# Altium PCB PM6680_OCXO.PcbDoc
Units mil, origin at the board's own origin, x right, y up, seen from the top; angles counter-clockwise.
Board outline 3573.96 x 1771.68 mil, 2 copper layers (Top Layer, Bottom Layer); 27 components, 13 nets, 94 pads, 1064 vias.
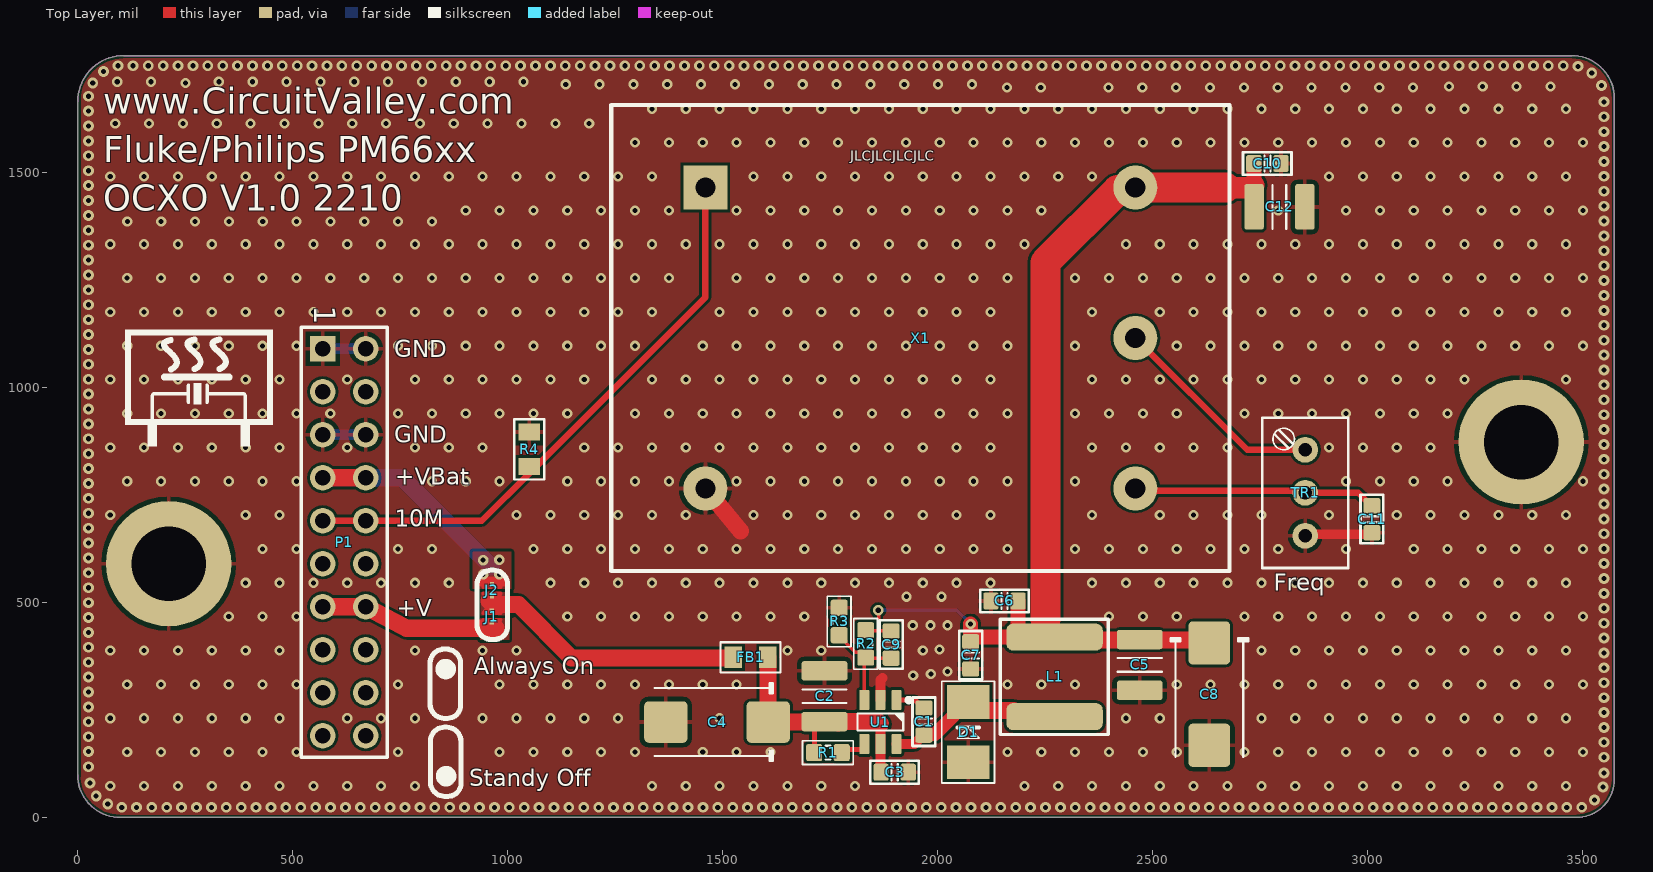
[diagram p0: Top Layer view]
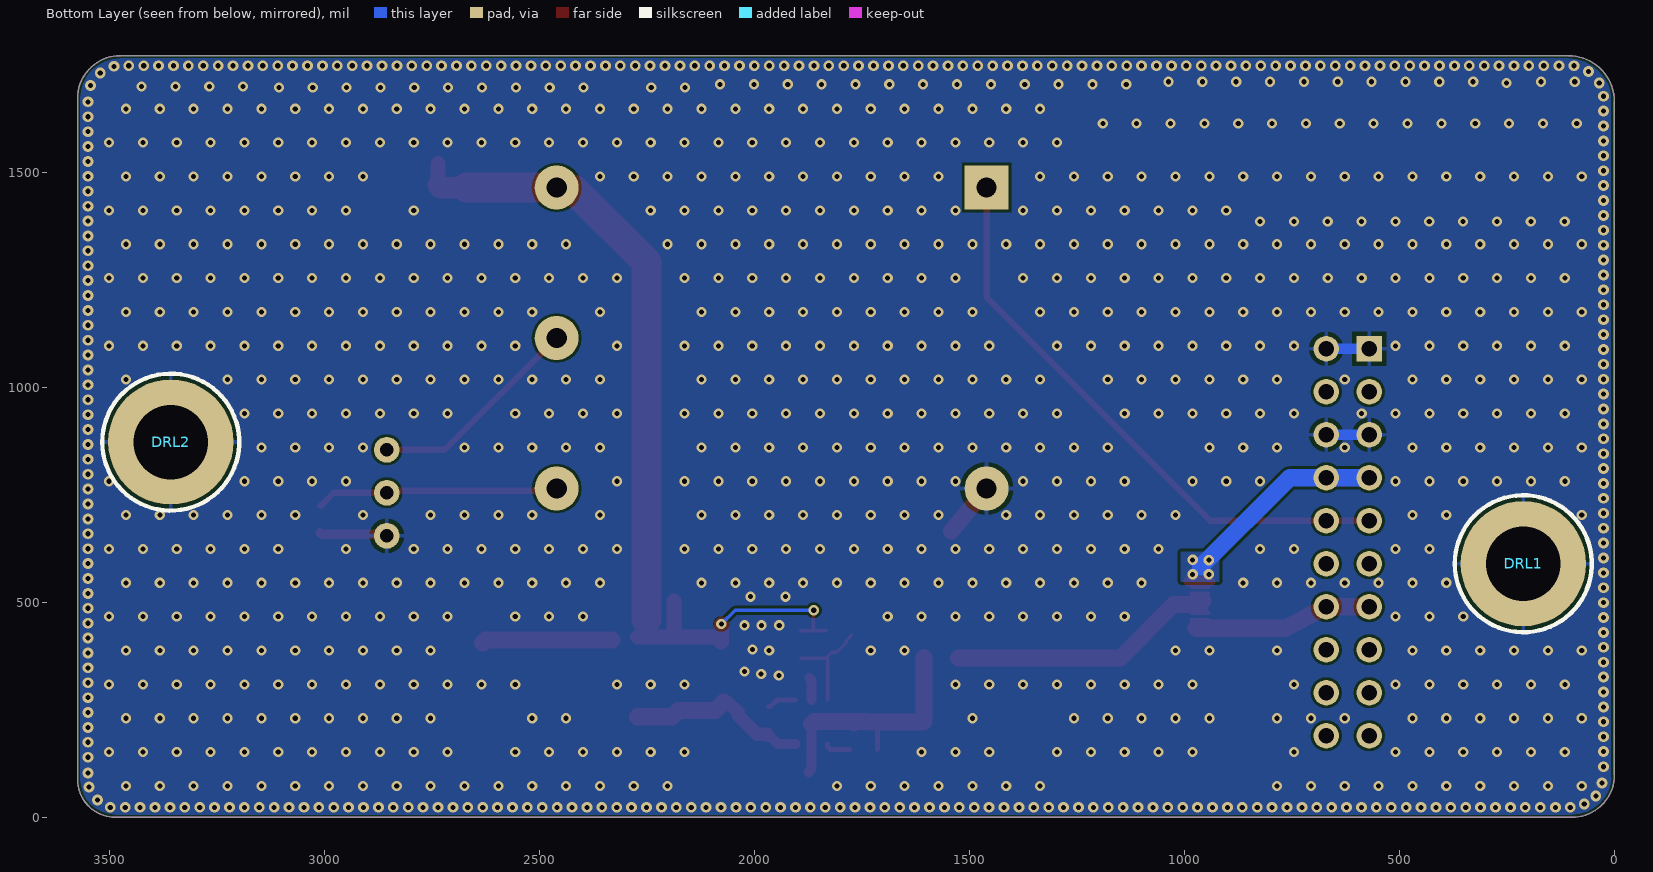
[diagram p1: Bottom Layer view, seen from below]
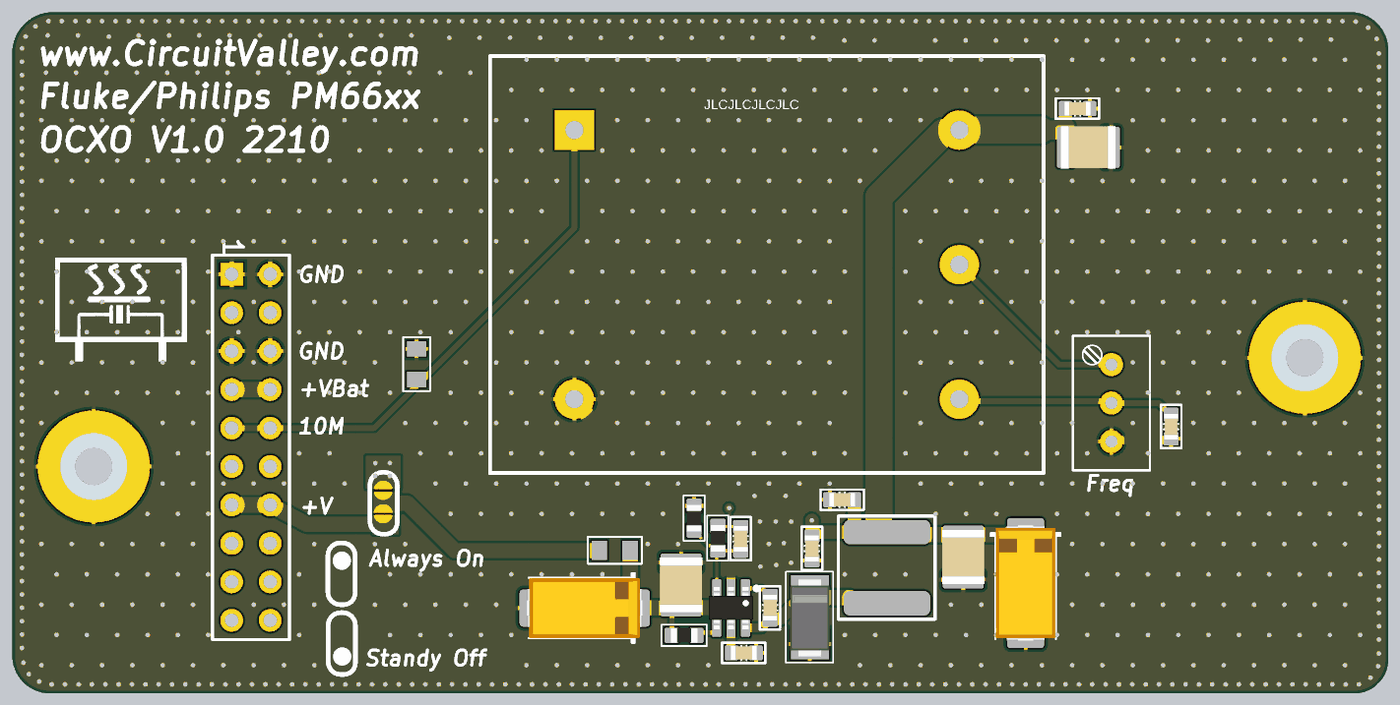
[diagram p2: 3D render of the assembled board from above, using the file's embedded part models]

## Layer stack, top to bottom
Top Solder: solder mask 0.4, Solder Resist, Dk 3.5
Top Layer: signal copper 1.4
Dielectric 1: dielectric 12.6, FR-4, Dk 4.8
Bottom Layer: signal copper 1.4
Bottom Solder: solder mask 0.4, Solder Resist, Dk 3.5

## Board outline
98.79,0 cw(c98.79,98.79) 0,98.79 0,1665 cw(c106.68,1665) 106.68,1771.68 3474.88,1771.68 cw(c3474.88,1672.6) 3573.96,1672.6 3573.96,88.18 cw(c3485.77,88.18) 3485.77,0

## Design rules (kind name [scope] priority, off if disabled: settings)
Clearance [All] p1: gap=6 ignorepadtopadclearanceinfootprint=FALSE except(0: Arc-Hole Track-Hole SMDPad-Hole THPad-Hole Via-Hole Fill-Hole Poly-Hole Region-Hole Text-Hole)
ComponentClearance [All] p1: gap=10 collisioncheckmode=3 verticalgap=3.94 showdistances=FALSE
DiffPairsRouting [All] p1: maxlimit=10 minlimit=6 mostfreqgap=6 toplayer_minwidth=6 toplayer_maxwidth=15 toplayer_prefwidth=6 bottomlayer_minwidth=6 bottomlayer_maxwidth=15 bottomlayer_prefwidth=6 maxuncoupledlength=500
MatchedLengths MIPI2 [InNetClass('MIPI_2S')] p1: tolerance=5 checknetsindiffpair=TRUE checkdiffpairvsdiffpair=FALSE checkxsignals=FALSE checkothers=FALSE
MatchedLengths MIPI [InNetClass('MIPI')] p2: tolerance=5 checknetsindiffpair=TRUE checkdiffpairvsdiffpair=FALSE checkxsignals=FALSE checkothers=FALSE
PlaneConnect [All] p1: pad.planeconnectstyle=Relief pad.reliefexpansion=20 pad.reliefentries=4 pad.reliefconductorwidth=10 pad.reliefairgap=10 via.planeconnectstyle=Direct via.reliefexpansion=20 via.reliefentries=4 via.reliefconductorwidth=10 via.reliefairgap=10
PolygonConnect [All] p1: thpad.connectstyle=Relief thpad.reliefconductorwidth=10 thpad.reliefentries=4 thpad.polygonreliefangle="90 Angle" thpad.airgapwidth=10 smdpad.connectstyle=Relief smdpad.reliefconductorwidth=10 smdpad.reliefentries=4 smdpad.polygonreliefangle="90 Angle" smdpad.airgapwidth=10 via.connectstyle=Direct via.reliefconductorwidth=10 via.reliefentries=4 via.polygonreliefangle="90 Angle" via.airgapwidth=10
RoutingVias [All] p1: holewidth=11.81 width=24 viastyle="Through Hole" minholewidth=10 minwidth=20 maxholewidth=196.85 maxwidth=250
SolderMaskExpansion [All] p1: expansion=4 istentingtop=FALSE
Width [All] p1: maxlimit=500 minlimit=6 preferedwidth=10
27 further rules are at their usual default settings.

## Components (designator, comment, footprint, x,y, rotation, side; value= is the part's Value field where it differs from the comment)
C1 "22n" CAPC1608N 1968.26,222.88 r90 top
C2 "10µ" CAPC3225N 1737.01,281.88 r90 top
C3 "100n" CAPC1608N 1900.18,105.2 r0 top
C4 "47uf 20V D" CAPMP7343X310N 1487.01,221.88 r180 top
C5 "10µ" CAPC3225N 2470.04,354.68 r270 top
C6 "10n" CAPC1608N 2155.59,503.47 r180 top
C7 "100n" CAPC1608N 2077.01,376.88 r270 top
C8 "47uf 20V D" CAPMP7343X310N 2632.01,286.88 r270 top
C9 "100pF" CAPC1608N 1892.01,401.88 r270 top
C10 "100n" CAPC1608N 2767.01,1520.81 r0 top
C11 "100n" CAPC1608N 3010,693.5 r270 top
C12 "10µ" CAPC3225N 2795,1420 r0 top
D1 "MBRS140" DIODE-SMA 2071.53,93.94 r270 top
DRL1 "Wurth Standoff" Wurth_PCB_STANDOFF_7740_6mm 211.73,590 r180 bottom
DRL2 "Wurth Standoff" Wurth_PCB_STANDOFF_7740_6mm 3357.4,872.87 r180 bottom
FB1 "" 0805FB-600Z 1534.95,372.24 r0 top
J1 "SMD Jumper" SMD_Jumper#1 963.45,467.13 r90 top
J2 "SMD Jumper" SMD_Jumper#2 963.45,528.12 r270 top
L1 "NR6028T4R7M" TAIYO_NR6028T4R7M 2272.01,326.88 r90 top
P1 "Header 10X2" HDR2X10 570,1090 r270 top
R1 "Thick Film" RESC1608N_ZERO 1745.03,150.77 r0 top value=100K
R2 "Thick Film" RESC1608N_ZERO 1832.83,403.52 r270 top value=49.9K
R3 "Thick Film" RESC1608N_ZERO 1771.1,455.68 r270 top value=9.53K
R4 "49.9R" 0805R-5K6 1050.35,826.13 r90 top
TR1 "" TRIMMER-MT 2855,655 r90 top
U1 "AP5100" SOT23-6 1867.01,221.88 r270 top
X1 "OCXO 36x27" OCXO_Small 1960,1115 r270 top

## Footprints (in the part's own frame and the unit in brackets; to place one, negate y for a bottom-side part, rotate by r counter-clockwise, add the part's x,y. Pads: shape width x height; smd on the part's side, far side on the other; paste and mask are expansions set on the pad)
0805FB-600Z [mil] "FERRITE BEAD 0805"
  rect 40x50 smd: 1(-10,0) 2(70,0)
  silkscreen extent -40,-35 100,35, body extent -11,-25 70,25, height 26
0805R-5K6 [mil] "RESISTOR 0805"
  rect 40x50 smd: 1(-10,0) 2(70,0)
  silkscreen extent -40,-35 100,35, body extent -11,-25 70,25, height 27
CAPC1608N [mm] "Chip Capacitor, Body 1.6x0.8mm, 0603, IPC Medium Density"
  round 0.254 on Mech14: 0(0,0)
  rrect25% 0.9x1 smd: 1(-0.8,0) 2(0.8,0)
  silkscreen extent -1.44,-0.67 1.42,0.68, body extent -0.85,-0.45 0.85,0.45, height 0.89
CAPC3225N [mm] "Chip Capacitor, Body 3.2x2.5mm, 1210, IPC Medium Density"
  round 0.508 on Mech14: 0(0,0)
  rrect25% 1.15x2.7 smd: 1(-1.5,0) 2(1.5,0)
  silkscreen extent -0.4,-1.3 0.4,1.3, body extent -1.8,-1.4 1.8,1.4, height 2.19
CAPMP7343X310N [mm] "Molded body capacitor, Body 7.3x4.3mm, 2917, IPC Nominal settings"
  round 1 on Mech14: 0(0,0)
  rrect20% 2.55x2.45 smd: 1(-3.025,0) 2(3.025,0)
  silkscreen extent -3.3,-2.3 3.7,2.3, body extent -3.8,-1.97 3.8,1.98, height 3.1
DIODE-SMA [mm]
  rect 2x2.5 smd: A(-0.875,0) K(-4.425,0)
  silkscreen extent -5.65,-1.58 0.35,1.55, body extent -5.2,-1.3 0,1.3, height 2.4
HDR2X10 [mm] "Connector; Header; 10x2 Position"
  rect 1.5x1.5 hole 0.9: 1(0,0)
  round 1.5 hole 0.9: 2(0,2.54) 3(2.54,0) 4(2.54,2.54) 5(5.08,0) 6(5.08,2.54) 7(7.62,0) 8(7.62,2.54) 9(10.16,0) 10(10.16,2.54) 11(12.7,0) 12(12.7,2.54) 13(15.24,0) 14(15.24,2.54) 15(17.78,0) 16(17.78,2.54) 17(20.32,0) 18(20.32,2.54) 19(22.86,0) 20(22.86,2.54)
  silkscreen extent -1.27,-1.27 24.13,3.81
OCXO_Small [mm] "Bliley 6891 ISOTEMP OCXO131"
  rect 2.6x2.6 hole 1.2: 1(-8.89,-12.7)
  round 2.6 hole 1.2: 2(8.89,-12.7) 3(8.89,12.7) 4(0,12.7) 5(-8.89,12.7)
  silkscreen extent -13.77,-18.26 13.77,18.26, body extent -13.77,-18.26 13.77,18.24, height 19.8
RESC1608N_ZERO [mm] "Chip Resistor, Body 1.6x0.8mm, 0603, IPC Medium Density"
  round 0.254 on Mech14: 0(0,0)
  rrect25% 0.95x1 smd: 1(-0.813,0) 2(0.813,0)
  Top Layer pour cut-out: -0.4,0.6 0.4,0.6 0.4,-0.6 -0.4,-0.6
  silkscreen extent -1.5,-0.7 1.5,0.7, body extent -0.87,-0.47 0.88,0.48, height 0.54
SMD_Jumper#1 [mil]
  rect 10x10 smd paste-300: 1(-13.86,0.05)
  rect 10x10 smd paste-30: 2(14.14,0.05)
  Top Layer region: 8,18 10,18 20,8 20,-9 11,-18 8,-18
  Top Layer region: -8,18 -10,18 -20,8 -20,-9 -11,-18 -8,-18
  Top Layer lines w8: -7.17,20.43 ccw(c1,0) -7.17,-20.43 -7.17,-15 -7.17,0.05 -7.17,20.43 ; 7.17,20.43 cw(c-1,0) 21,0.05 cw(c-1,0) 21,-0.05 cw(c-1,0) 7.17,-20.43 7.17,0.05 7.17,20.43
SMD_Jumper#2 [mil]
  rect 10x10 smd paste-300: 1(-13.86,0.05)
  rect 10x10 smd paste-30: 2(14.14,0.05)
  Top Layer region: 8,18 10,18 20,8 20,-9 11,-18 8,-18
  Top Layer region: -8,18 -10,18 -20,8 -20,-9 -11,-18 -8,-18
  Top Layer lines w8: 7.17,-20.43 ccw(c-1,0) 21,0.05 ccw(c-1,0) 7.17,20.43 7.17,0.05 7.17,-20.43 ; -7.17,-20.43 cw(c1,0) -20.93,-1.74 cw(c1,0) -20.93,1.74 cw(c1,0) -7.17,20.43 -7.17,0.05 -7.17,-20.43
SOT23-6 [mm]
  round 0.5 on Mech14: 0(0,0)
  rrect25% 1.2x0.6 smd: 1(-1.3,0.95) 2(-1.3,0) 3(-1.3,-0.95) 4(1.3,-0.95) 5(1.3,0) 6(1.3,0.95)
  silkscreen extent -1.42,-1.35 0.51,1.81, body extent -1.4,-1.45 1.4,1.45, height 1.45
TAIYO_NR6028T4R7M [mm]
  rrect50% 1.6x5.7 smd: 1(-2.35,0) 2(2.35,0)
  silkscreen extent -3.4,-3.18 3.41,3.2, body extent -3,-3 3,3, height 2.8
TRIMMER-MT [mil]
  round 60 hole 32: 1(0,0) 2(200,0) W(100,0)
  silkscreen extent -75,-100 275,100
Wurth_PCB_STANDOFF_7740_6mm [mm] "9774010360"
  round 7.4 hole 4.4: 0(0,0)
  silkscreen extent -4.05,-4.05 4.04,4.05, body extent -3,-3 3,3, height 6.01

## Part data
C1 C3 C6 C7 C9 C10 C11: library part CAPC_10p_0603_NP0_1%_50V, "Capacitor SMD Cer 10pF 5% 50V NP0 0603", Manufacturer 1="Murata Electronics North America", Manufacturer Part Number 1=GRM1885C1H100FA01J, Operating Temperature="-55°C ~ 125°C", Package / Case="0603 (1608 Metric)", Ratings="50V; NP0", Supplier Part Number 1=GRM1885C1H100FA01J-ND, Tolerance=±5%, Part=C0603X104K5RAC, Size / Dimension="0.063\" L x 0.032\" W (1.60mm x 0.81mm)", Supplier 1=Digi-Key, Thickness (Max)="0.035\" (0.90mm)"
C2 C5 C12: library part CAPC_10u_1210_50V, "Capacitor SMD Cer 10uF 20% 16V X5R 1210", Manufacturer 1="Taiyo Yuden", Manufacturer Part Number 1=UMK325BJ106MM-T, Package / Case="1210 (3225 Metric)", Ratings="50V; X5R", Supplier Part Number 1=587-2225-1-ND, Tolerance=±20%, Material=ceramic, Size / Dimension="0.126\" L x 0.098\" W (3.20mm x 2.50mm)", Supplier 1=Digi-Key
C4 C8: library part CAPT_330u_2917_6V3, "Capacitor SMD Tant 330uF 20% 6V3 2917", ESR (Equivalent Series Resistance)="15 mOhm", Manufacturer Part Number=T520D337M006ATE015, Manufacturer Size Code=D, Operating Temperature="-55°C ~ 125°C", Package / Case="2917 (7343 Metric)", Ratings=6.3V, Supplier Part Number 1=399-4052-1-ND, Tolerance=±20%, ComponentLink1Description="T520D Datasheet", ComponentLink1URL=http://www.kemet.com/datasheets&T520D337M006ATE015, Height - Seated (Max)="0.122\" (3.10mm)", Material="Solid Tantalum", Part=T495D476K020ATE175, Size / Dimension="0.287\" L x 0.169\" W (7.30mm x 4.30mm)", Supplier 1=Digi-Key
D1: "DIODE", Supplier Part Number 1=MBRS140FSTR-ND, Supplier 1=Digi-Key
DRL1 DRL2: library part PCB_Sandoff, Part=9774050360
FB1: library part 0805FB-600Z, "FERRITE BEAD 600 OHM 2A", Part=ILHB0805ER300V, Reel=F5
J1 J2: library part SMD_Jumper
L1: library part inductor_smd
P1: "Header, 10-Pin, Dual row", LatestRevisionDate=17-Jul-2002, LatestRevisionNote="Re-released for DXP Platform.", Publisher="Altium Limited"
R1 R2 R3: library part RES_0R_0603, "Resistor SMD chip 0.0 Ohm 0.1W 0603", Manufacturer 1=Vishay/Dale, Manufacturer Part Number 1=CRCW06030000Z0EA, Package / Case="0603 (1608metric)", Ratings=1/10W, Supplier Part Number 1=541-0.0GCT-ND, Tolerance=±5%, Supplier 1=Digi-Key
R4: library part 0805R-5K6, "RESISTOR 0805 1/4 WATT THIN FILM", Part=RK73H2ATTD2150F
TR1: library part THTRIM-GENERIC, "TRIMMABLE RESISTOR", Part=T93XA103KT20
X1: library part OCXO_Small_Bliey_6891_isotemp_ocxo131, Part="CTS 970"

## Via types
v1: diameter 23.62, hole 11.81, Top Layer to Bottom Layer, tented both sides, 759 vias
v2: diameter 25, hole 12.01, Top Layer to Bottom Layer, 299 vias
v3: diameter 24, hole 11.81, Top Layer to Bottom Layer, tented both sides, 6 vias

## Nets (pads, with @x,y where several pads share a name; then routed paths per layer and width w, separated by ;. In a path a pad name is that pad's centre, name@x,y a point inside that pad or via, vN(x,y) a via of type N, cw(c..) or ccw(c..) an arc to the next point about the centre after c; other vN are vias at no path point)
10Mhz: P1.9 P1.10 R4.1 X1.1 | length 1360.4
  Top Layer w15: P1.9 P1.10 850,690 940,690 1053,803 1460,1210 X1.1
24V: FB1.1 J1.2 J2.2 | length 655.3
  Top Layer w19.68: J1.2 963.39,488.13 963.39,496.61 963.39,498.01 ; 963.5,498.01 963.5,507.12 J2.2
  Top Layer w39.37: 957,503 963.39,496.61 965,495 1025,495 1148.86,371.14 FB1.1@1524.89,371.14 ; 963.59,495 963.69,495
+5V: C5.1 C6.1 C7.1 C8.1 C9.1 C10.1 C12.1 L1.2 R2.1 X1.5 | length 2418.2
  Top Layer w8: R2.1 1834.28,434.09 1862.79,434.09 ; v3(1862.01,481.88) 1862.79,481.1 1862.79,434.09 ; C9.1 1891.31,434.09 1862.79,434.09
  Top Layer w35: v3(2076.97,449.88) C7.1 C7.1 2078.98,408.38 2090.01,419.4 L1.2@2208.02,419.4 ; C6.1 2186.99,503.37 2186.99,433.4 2200.98,419.4 L1.2@2208.02,419.4 ; L1.2 L1.2@2208.02,419.4 ; C10.1 2735.73,1520.6 C12.1@2735.73,1470
  Top Layer w40: L1.2@2331.5,412.69 2625.3,412.69 C8.1
  Top Layer w50: 2670,1465 2730.73,1465 C12.1@2735.73,1470
  Top Layer w70: 2250.71,460.41 2250.71,1290.71 2418.81,1458.81 2453.81,1458.81 X1.5 2670,1465
  Bottom Layer w8: v3(1862.01,481.88) 2044.97,481.88 v3(2076.97,449.88)
GND: C2.2 C3.2 C4.2 C5.2 C6.2 C7.2 C8.2 C10.2 C11.2 C12.2 D1.A DRL1.0 DRL2.0 P1.1 P1.2 P1.5 P1.6 R3.1 R4.2 TR1.1 U1.2 X1.2 | length 539.5
  Top Layer w22: TR1.1 2858.5,658.5 3006.5,658.5 C11.2
  Top Layer w23.62: U1.2 1867.01,319.01 1872,324
  Top Layer w39.37: X1.2 1542,666
  Bottom Layer w23.62: P1.5 P1.6 ; P1.1 P1.2
  other v1: 75.83,73.23 154.57,73.23 233.31,73.23 312.05,73.23 390.79,73.23 469.53,73.23 548.27,73.23 627.01,73.23 705.75,73.23 784.49,73.23 1335.67,73.23 1414.41,73.23 1493.15,73.23 1571.89,73.23 1650.63,73.23 1729.37,73.23 1808.11,73.23 2201.81,73.23 2280.55,73.23 2359.29,73.23 2438.03,73.23 2516.77,73.23 2595.52,73.23 2674.26,73.23 2753,73.23 2831.74,73.23 2910.48,73.23 2989.22,73.23 3067.96,73.23 3146.7,73.23 3225.44,73.23 3304.18,73.23 3382.92,73.23 3461.66,73.23 115.2,151.97 193.94,151.97 272.68,151.97 351.42,151.97 430.16,151.97 508.9,151.97 745.12,151.97 981.34,151.97 1060.08,151.97 1138.82,151.97 1217.56,151.97 1296.3,151.97 1453.78,151.97 1532.52,151.97 1611.26,151.97 2162.44,151.97 2241.18,151.97 2319.92,151.97 2398.66,151.97 2477.4,151.97 2556.14,151.97 2713.63,151.97 2792.37,151.97 2871.11,151.97 2949.85,151.97 3028.59,151.97 3107.33,151.97 3186.07,151.97 3264.81,151.97 3343.55,151.97 3422.29,151.97 3501.03,151.97 75.83,230.71 154.57,230.71 233.31,230.71 312.05,230.71 390.79,230.71 469.53,230.71 627.01,230.71 705.75,230.71 784.49,230.71 941.97,230.71 1020.71,230.71 1099.45,230.71 1178.19,230.71 1256.93,230.71 1493.15,230.71 2438.03,230.71 2516.77,230.71 2753,230.71 2831.74,230.71 2910.48,230.71 2989.22,230.71 3067.96,230.71 3146.7,230.71 3225.44,230.71 3304.18,230.71 3382.92,230.71 3461.66,230.71 115.2,309.45 193.94,309.45 272.68,309.45 351.42,309.45 430.16,309.45 508.9,309.45 745.12,309.45 981.34,309.45 1060.08,309.45 1138.82,309.45 1217.56,309.45 1296.3,309.45 1375.04,309.45 1453.78,309.45 1532.52,309.45 2162.44,309.45 2241.18,309.45 2319.92,309.45 2556.14,309.45 2634.89,309.45 2713.63,309.45 2792.37,309.45 2871.11,309.45 2949.85,309.45 3028.59,309.45 3107.33,309.45 3186.07,309.45 3264.81,309.45 3343.55,309.45 3422.29,309.45 3501.03,309.45 1943.25,329.77 1984.25,333.77 2023.25,339.77 75.83,388.19 154.57,388.19 233.31,388.19 312.05,388.19 390.79,388.19 469.53,388.19 784.49,388.19 941.97,388.19 1020.71,388.19 1650.63,388.19 1729.37,388.19 1965.59,388.19 2753,388.19 2831.74,388.19 2910.48,388.19 2989.22,388.19 3067.96,388.19 3146.7,388.19 3225.44,388.19 3304.18,388.19 3382.92,388.19 3461.66,388.19 2004.25,390.77 1942.25,446.77 1983.25,446.77 2023.25,446.77 351.42,466.93 430.16,466.93 508.9,466.93 1138.82,466.93 1217.56,466.93 1296.3,466.93 1375.04,466.93 1453.78,466.93 1532.52,466.93 1611.26,466.93 1690,466.93 2398.66,466.93 2477.4,466.93 2556.14,466.93 2713.63,466.93 2792.37,466.93 2871.11,466.93 2949.85,466.93 3028.59,466.93 3107.33,466.93 3186.07,466.93 3264.81,466.93 3343.55,466.93 3422.29,466.93 3501.03,466.93 1928.06,513.36 2008.96,513.36 390.79,545.67 469.53,545.67 548.27,545.67 627.01,545.67 705.75,545.67 784.49,545.67 863.23,545.67 1099.45,545.67 1178.19,545.67 1256.93,545.67 1335.67,545.67 1414.41,545.67 1493.15,545.67 1571.89,545.67 1650.63,545.67 1729.37,545.67 1808.11,545.67 1886.85,545.67 1965.59,545.67 2044.33,545.67 2123.07,545.67 2359.29,545.67 2438.03,545.67 2516.77,545.67 2595.52,545.67 2674.26,545.67 2753,545.67 2831.74,545.67 2910.48,545.67 2989.22,545.67 3067.96,545.67 3146.7,545.67 3225.44,545.67 3304.18,545.67 3382.92,545.67 3461.66,545.67 430.16,624.41 508.9,624.41 745.12,624.41 823.86,624.41 1060.08,624.41 1138.82,624.41 1217.56,624.41 1296.3,624.41 1375.04,624.41 1453.78,624.41 1532.52,624.41 1611.26,624.41 1690,624.41 1768.74,624.41 1847.48,624.41 1926.22,624.41 2004.96,624.41 2083.7,624.41 2162.44,624.41 2319.92,624.41 2398.66,624.41 2477.4,624.41 2556.14,624.41 2634.89,624.41 2713.63,624.41 2792.37,624.41 2949.85,624.41 3107.33,624.41 3186.07,624.41 3264.81,624.41 3343.55,624.41 3422.29,624.41 3501.03,624.41 75.83,703.15 390.79,703.15 469.53,703.15 1020.71,703.15 1099.45,703.15 1178.19,703.15 1256.93,703.15 1335.67,703.15 1414.41,703.15 1571.89,703.15 1650.63,703.15 1729.37,703.15 1808.11,703.15 1886.85,703.15 1965.59,703.15 2044.33,703.15 2123.07,703.15 2359.29,703.15 2516.77,703.15 2595.52,703.15 2674.26,703.15 2753,703.15 2910.48,703.15 3067.96,703.15 3146.7,703.15 3225.44,703.15 3304.18,703.15 3382.92,703.15 3461.66,703.15 115.2,781.89 193.94,781.89 272.68,781.89 351.42,781.89 430.16,781.89 508.9,781.89 823.86,781.89 902.6,781.89 981.34,781.89 1138.82,781.89 1217.56,781.89 1296.3,781.89 1375.04,781.89 1532.52,781.89 1611.26,781.89 1690,781.89 1768.74,781.89 1847.48,781.89 1926.22,781.89 2004.96,781.89 2083.7,781.89 2162.44,781.89 2319.92,781.89 2949.85,781.89 3028.59,781.89 3107.33,781.89 3186.07,781.89 3501.03,781.89 75.83,860.63 154.57,860.63 233.31,860.63 312.05,860.63 390.79,860.63 469.53,860.63 627.01,860.63 784.49,860.63 863.23,860.63 941.97,860.63 1178.19,860.63 1256.93,860.63 1335.67,860.63 1414.41,860.63 1493.15,860.63 1571.89,860.63 1650.63,860.63 1729.37,860.63 1808.11,860.63 1886.85,860.63 1965.59,860.63 2044.33,860.63 2123.07,860.63 2359.29,860.63 2438.03,860.63 2516.77,860.63 2595.52,860.63 2674.26,860.63 2910.48,860.63 2989.22,860.63 3067.96,860.63 3146.7,860.63 115.2,939.37 193.94,939.37 272.68,939.37 351.42,939.37 430.16,939.37 508.9,939.37 587.64,939.37 745.12,939.37 823.86,939.37 902.6,939.37 981.34,939.37 1060.08,939.37 1138.82,939.37 1296.3,939.37 1375.04,939.37 1453.78,939.37 1532.52,939.37 1611.26,939.37 1690,939.37 1768.74,939.37 1847.48,939.37 1926.22,939.37 2004.96,939.37 2083.7,939.37 2162.44,939.37 2319.92,939.37 2398.66,939.37 2477.4,939.37 2556.14,939.37 2713.63,939.37 2792.37,939.37 2871.11,939.37 2949.85,939.37 3028.59,939.37 3107.33,939.37 3186.07,939.37 75.83,1018.11 154.57,1018.11 233.31,1018.11 312.05,1018.11 390.79,1018.11 469.53,1018.11 627.01,1018.11 784.49,1018.11 863.23,1018.11 941.97,1018.11 1020.71,1018.11 1099.45,1018.11 1178.19,1018.11 1335.67,1018.11 1414.41,1018.11 1493.15,1018.11 1571.89,1018.11 1650.63,1018.11 1729.37,1018.11 1808.11,1018.11 1886.85,1018.11 1965.59,1018.11 2044.33,1018.11 2123.07,1018.11 2359.29,1018.11 2438.03,1018.11 2516.77,1018.11 2595.52,1018.11 2674.26,1018.11 2753,1018.11 2831.74,1018.11 2910.48,1018.11 2989.22,1018.11 3067.96,1018.11 3146.7,1018.11 3225.44,1018.11 3461.66,1018.11 115.2,1096.85 193.94,1096.85 272.68,1096.85 351.42,1096.85 430.16,1096.85 508.9,1096.85 745.12,1096.85 823.86,1096.85 902.6,1096.85 981.34,1096.85 1060.08,1096.85 1138.82,1096.85 1217.56,1096.85 1296.3,1096.85 1453.78,1096.85 1532.52,1096.85 1611.26,1096.85 1690,1096.85 1768.74,1096.85 1847.48,1096.85 1926.22,1096.85 2004.96,1096.85 2083.7,1096.85 2162.44,1096.85 2319.92,1096.85 2556.14,1096.85 2634.89,1096.85 2713.63,1096.85 2792.37,1096.85 2871.11,1096.85 2949.85,1096.85 3028.59,1096.85 3107.33,1096.85 3186.07,1096.85 3264.81,1096.85 3343.55,1096.85 3422.29,1096.85 3501.03,1096.85 75.83,1175.59 154.57,1175.59 233.31,1175.59 312.05,1175.59 390.79,1175.59 469.53,1175.59 548.27,1175.59 627.01,1175.59 705.75,1175.59 784.49,1175.59 863.23,1175.59 941.97,1175.59 1020.71,1175.59 1099.45,1175.59 1178.19,1175.59 1256.93,1175.59 1335.67,1175.59 1493.15,1175.59 1571.89,1175.59 1650.63,1175.59 1729.37,1175.59 1808.11,1175.59 1886.85,1175.59 1965.59,1175.59 2044.33,1175.59 2123.07,1175.59 2359.29,1175.59 2516.77,1175.59 2595.52,1175.59 2674.26,1175.59 2753,1175.59 2831.74,1175.59 2910.48,1175.59 2989.22,1175.59 3067.96,1175.59 3146.7,1175.59 3225.44,1175.59 3304.18,1175.59 3382.92,1175.59 3461.66,1175.59 115.2,1254.33 193.94,1254.33 272.68,1254.33 351.42,1254.33 430.16,1254.33 508.9,1254.33 587.64,1254.33 666.38,1254.33 745.12,1254.33 823.86,1254.33 902.6,1254.33 981.34,1254.33 1060.08,1254.33 1138.82,1254.33 1217.56,1254.33 1296.3,1254.33 1375.04,1254.33 1532.52,1254.33 1611.26,1254.33 1690,1254.33 1768.74,1254.33 1847.48,1254.33 1926.22,1254.33 2004.96,1254.33 2083.7,1254.33 2162.44,1254.33 2319.92,1254.33 2398.66,1254.33 2477.4,1254.33 2556.14,1254.33 2634.89,1254.33 2713.63,1254.33 2792.37,1254.33 2871.11,1254.33 2949.85,1254.33 3028.59,1254.33 3107.33,1254.33 3186.07,1254.33 3264.81,1254.33 3343.55,1254.33 3422.29,1254.33 3501.03,1254.33 75.83,1333.07 154.57,1333.07 233.31,1333.07 312.05,1333.07 390.79,1333.07 469.53,1333.07 548.27,1333.07 627.01,1333.07 705.75,1333.07 784.49,1333.07 863.23,1333.07 941.97,1333.07 1020.71,1333.07 1099.45,1333.07 1178.19,1333.07 1256.93,1333.07 1335.67,1333.07 1414.41,1333.07 1493.15,1333.07 1571.89,1333.07 1650.63,1333.07 1729.37,1333.07 1808.11,1333.07 1886.85,1333.07 1965.59,1333.07 2044.33,1333.07 2123.07,1333.07 2201.81,1333.07 2438.03,1333.07 2516.77,1333.07 2595.52,1333.07 2674.26,1333.07 2753,1333.07 2831.74,1333.07 2910.48,1333.07 2989.22,1333.07 3067.96,1333.07 3146.7,1333.07 3225.44,1333.07 3304.18,1333.07 3382.92,1333.07 3461.66,1333.07 115.52,1385.61 194.26,1385.61 273,1385.61 351.74,1385.61 430.48,1385.61 509.22,1385.61 587.96,1385.61 666.7,1385.61 745.44,1385.61 824.18,1385.61 902.6,1411.81 981.34,1411.81 1060.08,1411.81 1138.82,1411.81 1217.56,1411.81 1296.3,1411.81 1375.04,1411.81 1532.52,1411.81 1611.26,1411.81 1690,1411.81 1768.74,1411.81 1847.48,1411.81 1926.22,1411.81 2004.96,1411.81 2083.7,1411.81 2162.44,1411.81 2241.18,1411.81 2792.37,1411.81 2949.85,1411.81 3028.59,1411.81 3107.33,1411.81 3186.07,1411.81 3264.81,1411.81 3343.55,1411.81 3422.29,1411.81 3501.03,1411.81 75.83,1490.55 154.57,1490.55 233.31,1490.55 312.05,1490.55 390.79,1490.55 469.53,1490.55 548.27,1490.55 627.01,1490.55 705.75,1490.55 784.49,1490.55 863.23,1490.55 941.97,1490.55 1020.71,1490.55 1099.45,1490.55 1178.19,1490.55 1256.93,1490.55 1335.67,1490.55 1571.89,1490.55 1650.63,1490.55 1729.37,1490.55 1808.11,1490.55 1886.85,1490.55 1965.59,1490.55 2044.33,1490.55 2123.07,1490.55 2201.81,1490.55 2280.55,1490.55 2359.29,1490.55 2910.48,1490.55 2989.22,1490.55 3067.96,1490.55 3146.7,1490.55 3225.44,1490.55 3304.18,1490.55 3382.92,1490.55 3461.66,1490.55 1296.3,1569.29 1375.04,1569.29 1453.78,1569.29 1532.52,1569.29 1611.26,1569.29 1690,1569.29 1768.74,1569.29 1847.48,1569.29 1926.22,1569.29 2004.96,1569.29 2083.7,1569.29 2162.44,1569.29 2241.18,1569.29 2319.92,1569.29 2398.66,1569.29 2477.4,1569.29 2556.14,1569.29 2634.89,1569.29 2713.63,1569.29 2792.37,1569.29 2871.11,1569.29 2949.85,1569.29 3028.59,1569.29 3107.33,1569.29 3186.07,1569.29 3264.81,1569.29 3343.55,1569.29 3422.29,1569.29 3501.03,1569.29 87.38,1614.28 166.12,1614.28 244.86,1614.28 323.6,1614.28 402.34,1614.28 481.08,1614.28 559.82,1614.28 638.56,1614.28 717.3,1614.28 796.04,1614.28 874.78,1614.28 953.52,1614.28 1032.26,1614.28 1111,1614.28 1189.74,1614.28 1335.67,1648.03 1414.41,1648.03 1493.15,1648.03 1571.89,1648.03 1650.63,1648.03 1729.37,1648.03 1808.11,1648.03 1886.85,1648.03 1965.59,1648.03 2044.33,1648.03 2123.07,1648.03 2201.81,1648.03 2280.55,1648.03 2359.29,1648.03 2438.03,1648.03 2516.77,1648.03 2595.52,1648.03 2674.26,1648.03 2753,1648.03 2831.74,1648.03 2910.48,1648.03 2989.22,1648.03 3067.96,1648.03 3146.7,1648.03 3225.44,1648.03 3304.18,1648.03 3382.92,1648.03 3461.66,1648.03 2161.12,1698 2239.86,1698 2397.34,1698 2476.08,1698 2554.82,1698 2633.56,1698 2712.3,1698 2791.04,1698 2869.78,1698 2948.52,1698 3027.26,1698 3106,1698 3189,1700 3267.74,1700 3346.48,1700 3425.22,1700 1135.12,1705 1213.86,1705 1293,1705 1371.34,1705 1450.08,1705 1528.82,1705 1607.56,1705 1686.3,1705 1765.04,1705 1843.78,1705 1922.52,1705 2001.26,1705 2080,1705 251,1708 92.12,1711 170.86,1711 328.34,1711 407.08,1711 485.82,1711 564.56,1711 643.3,1711 722.04,1711 800.78,1711 879.52,1711 958.26,1711 1037,1711
  other v2: 102.38,23.45 137.02,23.45 172.47,23.45 207.11,23.45 241.75,23.45 276.39,23.45 311.03,23.45 345.68,23.45 380.32,23.45 414.96,23.45 449.6,23.45 484.24,23.45 518.88,23.45 553.52,23.45 588.16,23.45 622.8,23.45 657.44,23.45 692.08,23.45 726.73,23.45 761.37,23.45 796.01,23.45 830.65,23.45 865.29,23.45 899.93,23.45 934.57,23.45 969.21,23.45 1003.85,23.45 1038.49,23.45 1073.13,23.45 1107.78,23.45 1142.42,23.45 1177.06,23.45 1211.7,23.45 1246.34,23.45 1280.98,23.45 1315.62,23.45 1350.26,23.45 1384.9,23.45 1419.54,23.45 1454.18,23.45 1488.83,23.45 1523.47,23.45 1558.11,23.45 1592.75,23.45 1627.39,23.45 1662.03,23.45 1696.67,23.45 1731.31,23.45 1765.95,23.45 1800.59,23.45 1835.23,23.45 1869.88,23.45 1904.52,23.45 1939.16,23.45 1973.8,23.45 2008.44,23.45 2043.08,23.45 2077.72,23.45 2112.36,23.45 2147,23.45 2181.64,23.45 2216.28,23.45 2250.93,23.45 2285.57,23.45 2320.21,23.45 2354.85,23.45 2389.49,23.45 2424.13,23.45 2458.77,23.45 2493.41,23.45 2528.05,23.45 2562.69,23.45 2597.33,23.45 2631.98,23.45 2666.62,23.45 2701.26,23.45 2735.9,23.45 2770.54,23.45 2805.18,23.45 2839.82,23.45 2874.46,23.45 2909.1,23.45 2943.74,23.45 2978.38,23.45 3013.02,23.45 3047.67,23.45 3082.31,23.45 3116.95,23.45 3151.59,23.45 3186.23,23.45 3220.87,23.45 3255.51,23.45 3290.15,23.45 3324.79,23.45 3359.43,23.45 3394.07,23.45 3428.72,23.45 3463.36,23.45 3498,23.45 70,31 3527.79,40.54 43,50 3547.79,70.54 29,80 3549.79,103.54 25.32,117.93 3549.79,140 25.27,153.13 3549.79,174.64 25.27,187.77 3549.79,209.28 25.27,222.41 3549.79,243.92 25.27,257.05 3549.79,278.56 25.27,291.69 3549.79,313.2 25.27,326.33 3549.79,347.85 25.27,360.97 3549.79,382.49 25.27,395.61 3549.79,417.13 25.27,430.25 3549.79,451.77 25.27,464.89 3549.79,486.41 25.27,499.53 3549.79,521.05 25.27,534.18 3549.79,555.69 25.27,568.82 3549.79,590.33 25.27,603.46 3549.79,624.97 25.27,638.1 3549.79,659.61 25.27,672.74 3549.79,694.25 25.27,707.38 3549.79,728.9 25.27,742.02 3549.79,763.54 25.27,776.66 3549.79,798.18 25.27,811.3 3549.79,832.82 25.27,845.94 3549.79,867.46 25.27,880.58 3549.79,902.1 25.27,915.23 3549.79,936.74 25.27,949.87 3549.79,971.38 25.27,984.51 3549.79,1006.02 25.27,1019.15 3549.79,1040.66 25.27,1053.79 3549.79,1075.3 25.27,1088.43 3549.79,1109.95 25.27,1123.07 3549.79,1144.59 25.27,1157.71 3549.79,1179.23 25.27,1192.35 3549.79,1213.87 25.27,1226.99 3549.79,1248.51 25.27,1261.63 3549.79,1283.15 25.27,1296.28 3549.79,1317.79 25.27,1330.92 3549.79,1352.43 25.27,1365.56 3549.79,1387.07 25.27,1400.2 3549.79,1421.71 25.27,1434.84 3549.79,1456.35 25.27,1469.48 3549.79,1491 25.27,1504.12 3549.79,1525.64 25.27,1538.76 3549.79,1560.28 25.27,1573.4 3549.79,1594.92 25.27,1608.04 3549.79,1629.56 25.27,1642.68 3549.79,1664.2 25.27,1677.33 3543.84,1702.39 35,1708 3521.53,1731.5 60,1735 3489.64,1746.8 94.07,1748.31 128.72,1748.31 164.16,1748.31 198.81,1748.31 233.45,1748.31 268.09,1748.31 302.73,1748.31 337.37,1748.31 372.01,1748.31 406.65,1748.31 441.29,1748.31 475.93,1748.31 510.57,1748.31 545.21,1748.31 579.86,1748.31 614.5,1748.31 649.14,1748.31 683.78,1748.31 718.42,1748.31 753.06,1748.31 787.7,1748.31 822.34,1748.31 856.98,1748.31 891.62,1748.31 926.26,1748.31 960.91,1748.31 995.55,1748.31 1030.19,1748.31 1064.83,1748.31 1099.47,1748.31 1134.11,1748.31 1168.75,1748.31 1203.39,1748.31 1238.03,1748.31 1272.67,1748.31 1307.31,1748.31 1341.96,1748.31 1376.6,1748.31 1411.24,1748.31 1445.88,1748.31 1480.52,1748.31 1515.16,1748.31 1549.8,1748.31 1584.44,1748.31 1619.08,1748.31 1653.72,1748.31 1688.36,1748.31 1723.01,1748.31 1757.65,1748.31 1792.29,1748.31 1826.93,1748.31 1861.57,1748.31 1896.21,1748.31 1930.85,1748.31 1965.49,1748.31 2000.13,1748.31 2034.77,1748.31 2069.41,1748.31 2104.06,1748.31 2138.7,1748.31 2173.34,1748.31 2207.98,1748.31 2242.62,1748.31 2277.26,1748.31 2311.9,1748.31 2346.54,1748.31 2381.18,1748.31 2415.82,1748.31 2450.46,1748.31 2485.11,1748.31 2519.75,1748.31 2554.39,1748.31 2589.03,1748.31 2623.67,1748.31 2658.31,1748.31 2692.95,1748.31 2727.59,1748.31 2762.23,1748.31 2796.87,1748.31 2831.51,1748.31 2866.16,1748.31 2900.8,1748.31 2935.44,1748.31 2970.08,1748.31 3004.72,1748.31 3039.36,1748.31 3074,1748.31 3108.64,1748.31 3143.28,1748.31 3177.92,1748.31 3212.56,1748.31 3247.2,1748.31 3281.85,1748.31 3316.49,1748.31 3351.13,1748.31 3385.77,1748.31 3420.41,1748.31 3455.05,1748.31
NetC1_1: C1.1 D1.K L1.1 U1.6 | length 422.3
  Top Layer w23.62: U1.6 1945.61,170.7 C1.1@1965.04,190.14
  Top Layer w31.5: C1.1 1970.23,193.35 1993.84,193.35 2038.06,237.57 2038.06,244.53 2061.68,268.15 D1.K
  Top Layer w40: D1.K 2090.9,248.78 2176.89,248.78 2191.3,234.36 L1.1
NetC1_2: C1.2 U1.1 | length 68.7
  Top Layer w11.81: U1.1 1947.6,273.06 1962.29,258.38 C1.2@1967.01,258.38
NetC2_1: C2.1 C3.1 C4.1 FB1.2 R1.1 U1.5 | length 604.4
  Top Layer w11.81: R1.1@1713.39,157.97 1713.39,206.1 C2.1@1729.65,222.35
  Top Layer w23.62: 1867.01,216.88 U1.5 1867.01,112.99 1873.13,106.87 C3.1@1873.13,104.9
  Top Layer w39.37: FB1.2 1605.27,371.92 1605.27,222.72 C4.1 1606.58,222.35 1713.39,222.35 1729.65,222.35 1736.54,222.35 C2.1 C2.1@1766.07,222.83 ; C2.1@1769.02,219.87 C2.1@1766.07,222.83 ; 1867.01,216.88 1861.07,222.83 C2.1@1766.07,222.83
NetC9_2: C9.2 R2.2 R3.2 U1.3 | length 242.5
  Top Layer w8: R3.2@1774.18,423.41 1786.36,411.23 1786.36,406.28 1808.67,383.97 1820.38,383.97 R2.2 ; U1.3 1829.61,368.29 R2.2 ; C9.2 1891.82,370.58 1833.77,370.58 R2.2
NetC11_1: C11.1 TR1.W X1.3 | length 566.6
  Top Layer w15: X1.3 2465,760 2850,760 TR1.W 2978.03,755 3008.03,725 C11.1
NetJ1_1: J1.1 P1.13 P1.14 | length 415.5
  Top Layer w40: P1.13 P1.14 756.25,444.6 765,440 973.15,440
NetJ2_1: J2.1 P1.7 P1.8 | length 630.2
  Top Layer w23.62: 939.05,549.05 961.7,549.05 965.19,549.05 990.2,549.05 990.39,549.25
  Top Layer w40: P1.7 P1.8
  Bottom Layer w40: P1.7 755,790 962.74,582.26
  other v3: 943.21,565.28 980.69,565.28 943.21,598.41 980.69,599.13
NetR1_2: R1.2 U1.4 | length 61.5
  Top Layer w11.81: R1.2@1777.4,157.97 1823.71,157.97 1829.61,163.88 U1.4
NetTR1_2: TR1.2 X1.4 | length 502.7
  Top Layer w15: X1.4 2720,855 TR1.2
pads on no net: C1.0 C2.0 C3.0 C4.0 C5.0 C6.0 C7.0 C8.0 C9.0 C10.0 C11.0 C12.0 P1.3 P1.4 P1.11 P1.12 P1.15 P1.16 P1.17 P1.18 P1.19 P1.20 R1.0 R2.0 R3.0 U1.0

## Polygon pours and split planes (outlines as drawn)
GND on Top Layer "GND_L01_P006" (solid, pour order 6): 99.26,0 cw(c103.13,95.13) 8,99 8,1668 cw(c108,1668) 108,1768 3469,1768 cw(c3469,1668) 3569,1668 3569,83 cw(c3486,83) 3486,0
NetJ1_1 on Top Layer "NETJ1_1_L01_P000" (solid, pour order 0): 936.63,463.69 1003.52,463.69 1003.52,413.01 936.45,413.01
24V on Top Layer "24V_L01_P001" (solid, pour order 1): 937.38,523.72 937.38,470.16 1003.45,470.16 1003.45,524.02
no net on Top Layer "NONET_L01_P005" (solid, pour order 5): 116,9
NetJ2_1 on Top Layer "NETJ2_1_L01_P004" (solid, pour order 4): 918.45,618.01 1008.45,618.01 1008.45,532.02 918.45,532.02
no net on Top Layer "NONET_L01_P003" (solid, pour order 3): 785,610
GND on Bottom Layer "GND_L02_P007" (solid, pour order 7): 99.26,0 cw(c103.13,95.13) 8,99 8,1668 cw(c108,1668) 108,1768 3469,1768 cw(c3469,1668) 3569,1668 3569,83 cw(c3486,83) 3486,0
NetJ2_1 on Bottom Layer "NETJ2_1_L02_P002" (solid, pour order 2): 918.45,618.01 1008.45,618.01 1008.45,548.01 918.45,548.01

## Keep-outs
Keep-Out Layer:
  lines w0.79: 0,98.79 ccw(c98.79,98.79) 98.79,0 230,0 3485.77,0 ccw(c3485.77,88.18) 3573.96,88.18 3573.96,1672.6 ccw(c3474.88,1672.6) 3474.88,1771.68 359.12,1771.68 106.68,1771.68 ccw(c106.68,1665) 0,1665 0,98.79

## Silkscreen, mask and mechanical layers (free items; w line width, h text height)
Top Overlay:
  drawing of 36 lines, arcs and shapes, not listed
  text "www.CircuitValley.com" at 59.31,1636 h60
  text "Fluke/Philips PM66xx" at 59.31,1524.29 h60
  text "JLCJLCJLCJLC" at 1796.92,1519.41 h39.37
  text "OCXO V1.0 2210" at 59.31,1411.1 h60
  text "GND" at 736.84,1070.54 h39.37
  text "GND" at 736.4,871.19 h39.37
  text "+VBat" at 738.99,773.87 h39.37
  text "10M" at 737,676 h39.37
  text "Freq" at 2781.81,527.52 h39.37
  text "+V" at 742,468 h39.37
  text "Always On" at 921.43,332.47 h39.37
  text "Standy Off" at 911,73 h39.37
Bottom Solder:
  drawing of 6 lines, arcs and shapes, not listed
  text "www.CircuitValley.com" at 1243.86,1641.44 h60
  text "Fluke/Philips PM66xx" at 1243.86,1529.73 h60
  text "OCXO V1.0 2210" at 1243.86,1416.54 h60

## Text inside footprints (layer, text, board x,y; h text height)
P1: Top Overlay "1" at 550,1190 h50 r270